# Altium PCB PCB1.PcbDoc
Units mil, origin at the board's own origin, x right, y up, seen from the top; angles counter-clockwise.
Board outline 6825 x 4110 mil, 2 copper layers (Top Layer, Bottom Layer); 37 components, 94 nets, 281 pads, 62 vias.
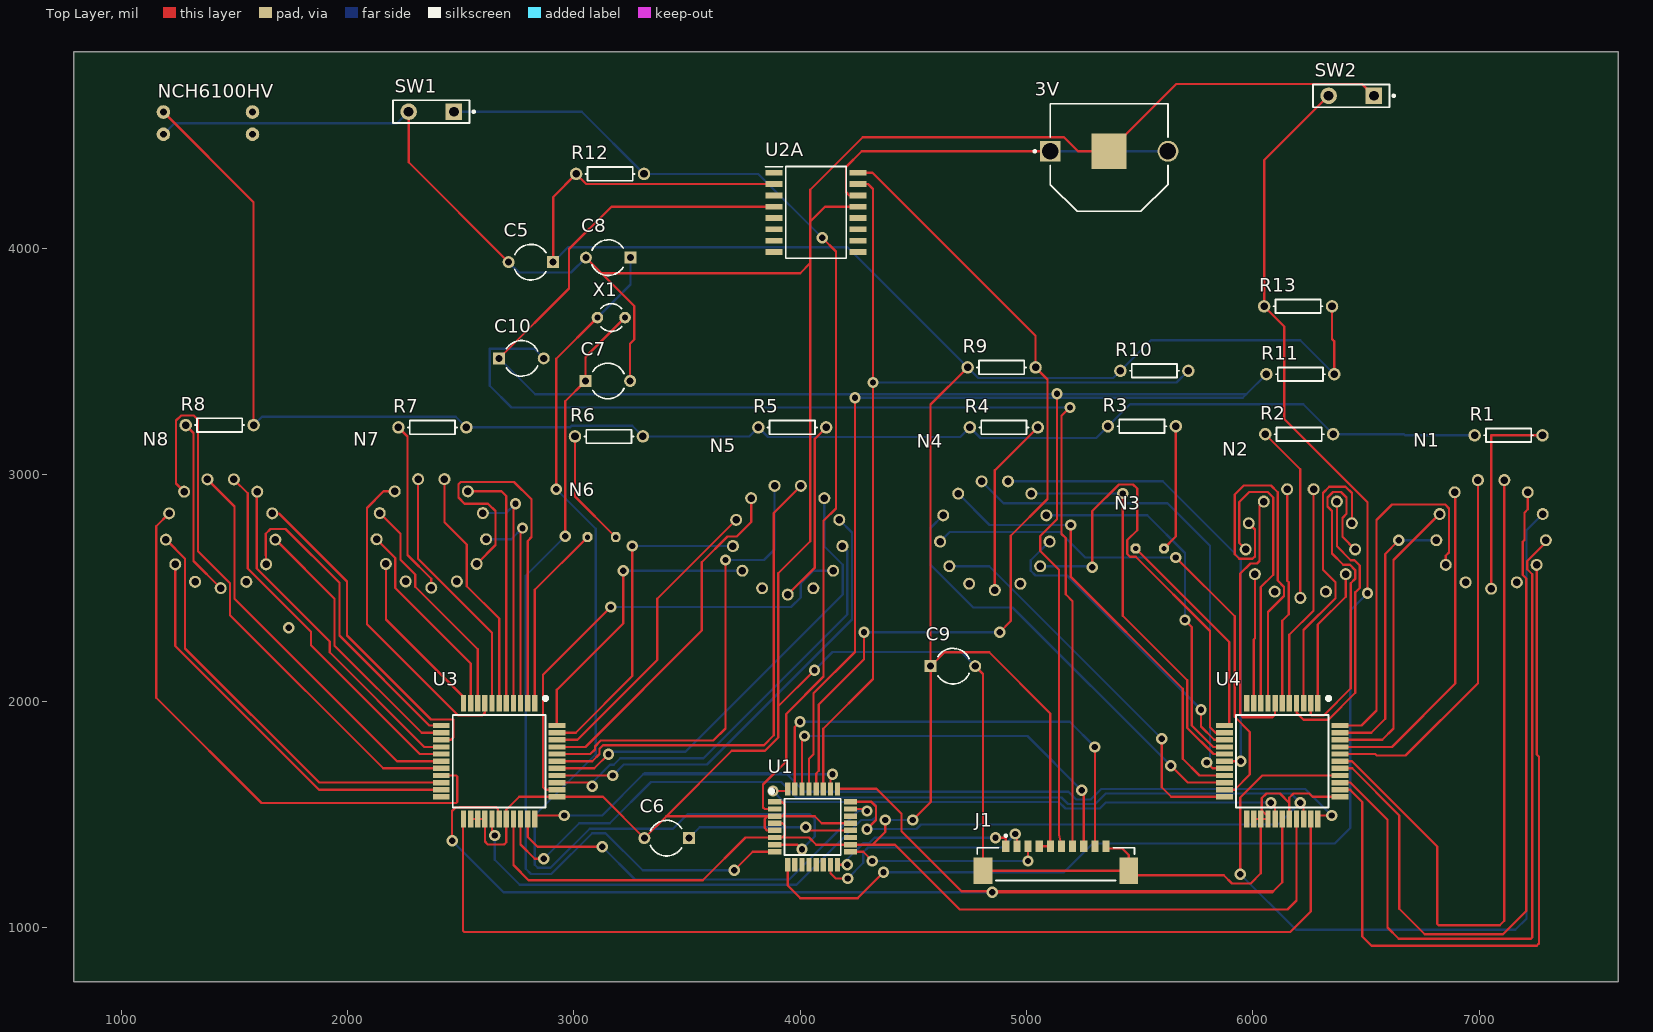
[diagram p0: Top Layer view]
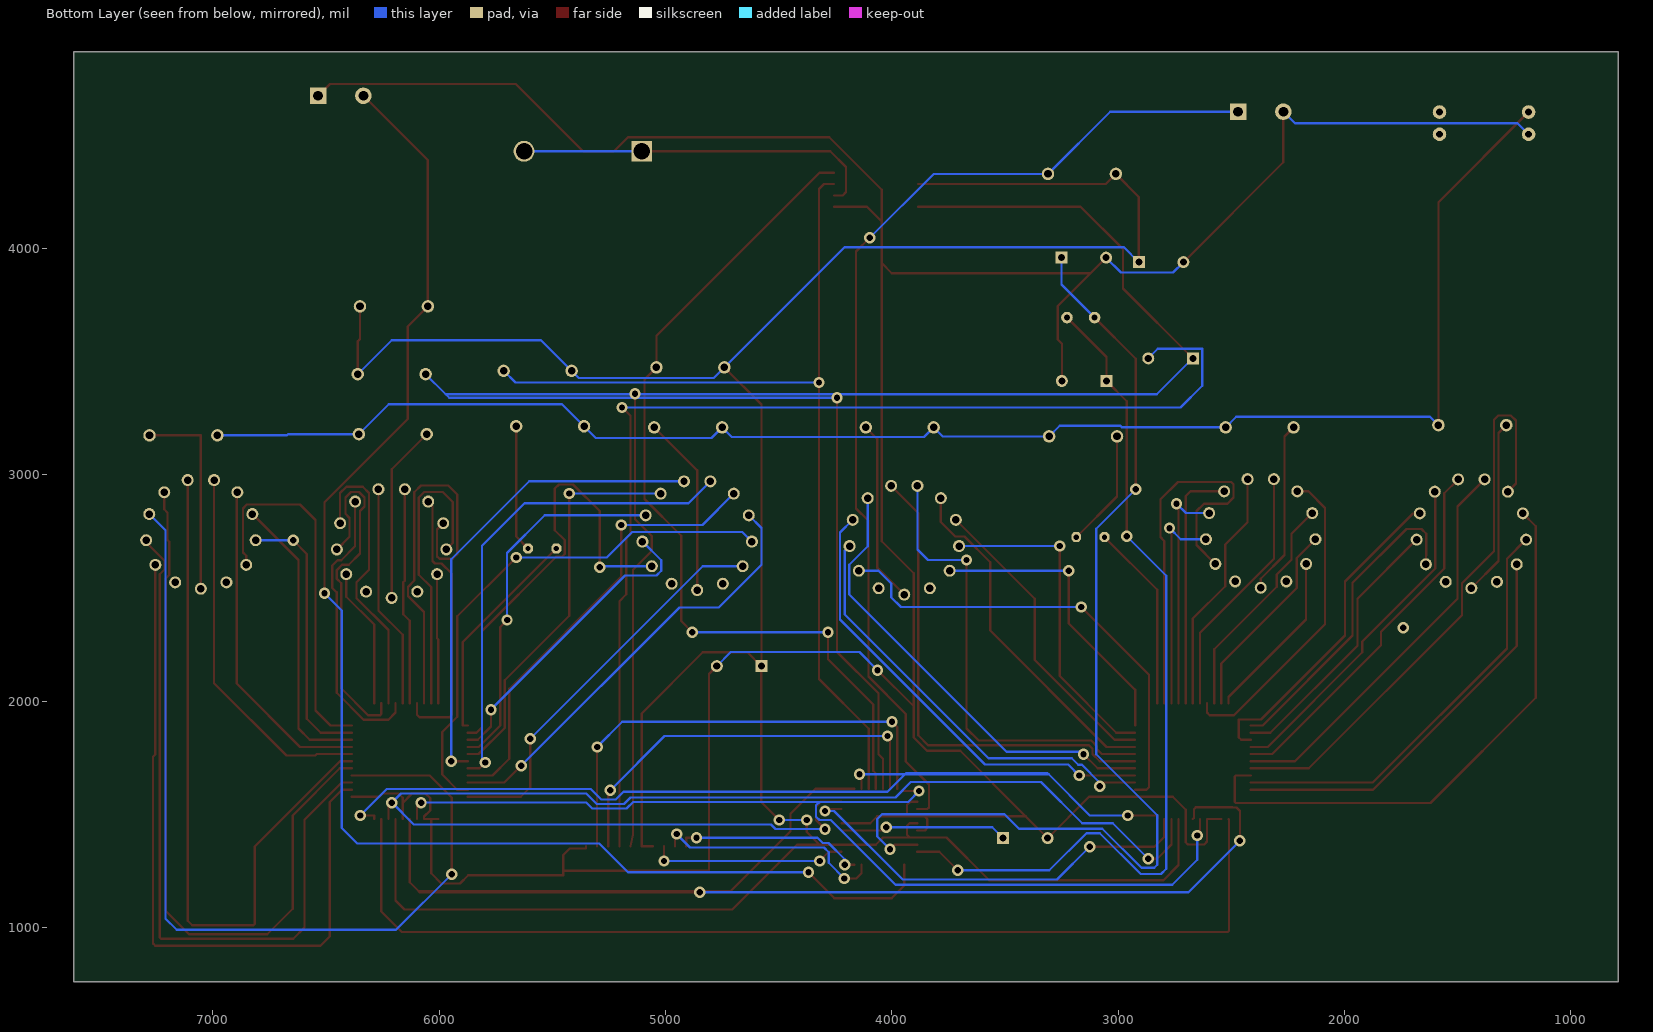
[diagram p1: Bottom Layer view, seen from below]

## Layer stack, top to bottom
Top Solder: solder mask 0.4, Solder Resist, Dk 3.5
Top Layer: signal copper 1.4
Dielectric 1: dielectric 12.6, FR-4, Dk 4.8
Bottom Layer: signal copper 1.4
Bottom Solder: solder mask 0.4, Solder Resist, Dk 3.5

## Board outline
790,760 7615,760 7615,4870 790,4870
cut-out: 8090,5925

## Design rules (kind name [scope] priority, off if disabled: settings)
Clearance [All] p1: gap=10 ignorepadtopadclearanceinfootprint=FALSE except(0: Arc-Hole Track-Hole SMDPad-Hole THPad-Hole Via-Hole Fill-Hole Poly-Hole Region-Hole Text-Hole)
PolygonConnect [All] p1: connectstyle=Relief reliefconductorwidth=10 reliefentries=4 polygonreliefangle="90 Angle" airgapwidth=10
RoutingVias [All] p1: holewidth=28 width=50 viastyle="Through Hole" minholewidth=28 minwidth=50 maxholewidth=28 maxwidth=50
SolderMaskExpansion [All] p1: expansion=4 istentingtop=FALSE
Width [All] p1: maxlimit=10 minlimit=10 preferedwidth=10
30 further rules are at their usual default settings.

## Classes and differential pairs
component class Sheet2: 3V C5 C6 C7 C8 C9 C10 J1 NCH6100HV R9 R10 R11 R12 R13 SW1 SW2 U1 U2A X1
component class Sheet1: N1 N2 N3 N4 N5 N6 N7 N8 R1 R2 R3 R4 R5 R6 R7 R8 U3 U4

## Components (designator, comment, footprint, x,y, rotation, side; value= is the part's Value field where it differs from the comment)
3V "3001" KSTN-3001_V 5365,4430 r0 top
C5 "" CAPR5-4X5 2810,3940 r180 top value=0.1µF
C6 "" CAPR5-4X5 3410,1395 r180 top value=0.1µF
C7 "" CAPR5-4X5 3150,3415 r0 top value=18pF
C8 "" CAPR5-4X5 3151.57,3960 r180 top value=18pF
C9 "" CAPR5-4X5 4675,2155 r0 top value=0.1µF
C10 "" CAPR5-4X5 2768.43,3515 r0 top value=0.1µF
J1 "53398-1071" MOLX-53398-1071_V 5130,1290 r180 top (schematic designator P?)
N1 "IN-14: medium numeric frontview nixie tube" IN-14 7053.25,2740.78 r0 top
N2 "IN-14: medium numeric frontview nixie tube" IN-14 6210,2700 r0 top
N3 "IN-3: nixie bulb" IN-3 5545,2675 r0 top
N4 "IN-14: medium numeric frontview nixie tube" IN-14 4860,2735 r0 top
N5 "IN-14: medium numeric frontview nixie tube" IN-14 3945,2715 r0 top
N6 "IN-3: nixie bulb" IN-3 3122.5,2725 r0 top
N7 "IN-14: medium numeric frontview nixie tube" IN-14 2370,2745 r0 top
N8 "IN-14: medium numeric frontview nixie tube" IN-14 1439.44,2743.44 r0 top
NCH6100HV "NCH6100HV" NCH6100HV 1580,4603.43 r180 top
R1 "" AXIAL-0.3 7130,3175 r0 top value=27k
R2 "" AXIAL-0.3 6205,3180 r180 top value=120k
R3 "" AXIAL-0.3 5510,3215 r0 top value=27k
R4 "" AXIAL-0.3 4900,3210 r0 top value=27k
R5 "" AXIAL-0.3 3965,3210 r0 top value=27k
R6 "" AXIAL-0.3 3155,3170 r180 top value=120k
R7 "" AXIAL-0.3 2375,3210 r180 top value=27k
R8 "" AXIAL-0.3 1435,3220 r180 top value=27k
R9 "" AXIAL-0.3 4890,3475 r180 top value=4.7k
R10 "" AXIAL-0.3 5565,3460 r180 top value=4.5k
R11 "" AXIAL-0.3 6210,3445 r180 top value=120k
R12 "" AXIAL-0.3 3160,4330 r180 top value=10k
R13 "" AXIAL-0.3 6200,3745 r180 top value=10k
SW1 "SW-PB" SPST-2 2370,4605 r180 top
SW2 "SW-PB" SPST-2 6435,4675 r180 top
U1 "ATMEGA328P-AUR" QFP80P900X900X120-32N 4055,1445 r0 top
U2A "DS3231M+TRL" SOIC127P1032X265-16N 4070,4160 r0 top
U3 "HV5622PG-G" QFP80P1390X1390X235-44N 2670,1735 r270 top
U4 "HV5622PG-G" QFP80P1390X1390X235-44N 6130,1735 r270 top
X1 "16MHz" R38 3165,3695 r90 top

## Footprints (in the part's own frame and the unit in brackets; to place one, negate y for a bottom-side part, rotate by r counter-clockwise, add the part's x,y. Pads: shape width x height; smd on the part's side, far side on the other; paste and mask are expansions set on the pad)
AXIAL-0.3 [mm] "Axial Device, Thru-Hole; 2 Leads; 0.3 in Pin Spacing"
  round 1.4 hole 0.85: 1(-3.81,0) 2(3.81,0)
  silkscreen extent -2.77,-0.76 2.77,0.76
CAPR5-4X5 [mm] "Capacitor; 2 Leads"
  rect 1.35x1.35 hole 0.8: 1(-2.5,0)
  round 1.35 hole 0.8: 2(2.5,0)
  silkscreen extent -1.69,-2 1.82,2
IN-3 [mil]
  oct 43.62x43.62 / inner round 40.3 / far side oct 43.62x43.62 hole 23.62: A(-62.5,0) K(62.5,0)
IN-14 [mm]
  round 1.348 hole 0.84: 0(5.094,-3.516) 1(-5.094,-3.516) 2(-6.145,-0.746) 3(-5.788,2.195) 4(-4.105,4.633) 5(-1.481,6.01) 6(1.481,6.01) 7(4.105,4.633) 8(5.788,2.195) 9(6.145,-0.746) A(0,-6.19) LHDP(2.877,-5.481) RHDP(-2.877,-5.481)
KSTN-3001_V [mm] "THD, 2-Leads, Body 13.21x12.07mm"
  rect 2.35x2.35 hole 1.85: 1(-6.605,0)
  round 2.35 hole 1.85: 2(6.605,0)
  rect 3.96x3.96 smd: 3(0,0)
  silkscreen extent -8.45,-6.73 6.61,5.34, body extent -6.61,-6.73 6.61,5.34, height 3
MOLX-53398-1071_V [mm] "SMD, 10-Leads, Body 17.65x3.7mm, Pitch 1.25mm"
  rect 0.8x1.3 smd: 1(5.625,-1.75) 2(4.375,-1.75) 3(3.125,-1.75) 4(1.875,-1.75) 5(0.625,-1.75) 6(-0.625,-1.75) 7(-1.875,-1.75) 8(-3.125,-1.75) 9(-4.375,-1.75) 10(-5.625,-1.75)
  rect 2.1x3 smd: MP1(8.175,1) MP2(-8.175,1)
  silkscreen extent -8.83,-3.07 8.82,2.1, body extent -8.82,-2.1 8.83,2.1, height 4.77
NCH6100HV [mil] "NCH6100HV"
  round 60 hole 30: 19(0,0) 20(0,98.43) 21(393.7,98.43) 22(393.7,0)
QFP80P900X900X120-32N [mm]
  rect 1.5x0.6 smd: 1(-4.25,2.8) 2(-4.25,2) 3(-4.25,1.2) 4(-4.25,0.4) 5(-4.25,-0.4) 6(-4.25,-1.2) 7(-4.25,-2) 8(-4.25,-2.8) 17(4.25,-2.8) 18(4.25,-2) 19(4.25,-1.2) 20(4.25,-0.4) 21(4.25,0.4) 22(4.25,1.2) 23(4.25,2) 24(4.25,2.8)
  rect 0.6x1.5 smd: 9(-2.8,-4.25) 10(-2,-4.25) 11(-1.2,-4.25) 12(-0.4,-4.25) 13(0.4,-4.25) 14(1.2,-4.25) 15(2,-4.25) 16(2.8,-4.25) 25(2.8,4.25) 26(2,4.25) 27(1.2,4.25) 28(0.4,4.25) 29(-0.4,4.25) 30(-1.2,4.25) 31(-2,4.25) 32(-2.8,4.25)
  silkscreen extent -4.8,-3.15 3.15,4.2, body extent -4.5,-4.5 4.5,4.5, height 1.2
QFP80P1390X1390X235-44N [mm]
  rect 1.9x0.6 smd: 1(-6.5,4) 2(-6.5,3.2) 3(-6.5,2.4) 4(-6.5,1.6) 5(-6.5,0.8) 6(-6.5,0) 7(-6.5,-0.8) 8(-6.5,-1.6) 9(-6.5,-2.4) 10(-6.5,-3.2) 11(-6.5,-4) 23(6.5,-4) 24(6.5,-3.2) 25(6.5,-2.4) 26(6.5,-1.6) 27(6.5,-0.8) 28(6.5,0) 29(6.5,0.8) 30(6.5,1.6) 31(6.5,2.4) 32(6.5,3.2) 33(6.5,4)
  rect 0.6x1.9 smd: 12(-4,-6.5) 13(-3.2,-6.5) 14(-2.4,-6.5) 15(-1.6,-6.5) 16(-0.8,-6.5) 17(0,-6.5) 18(0.8,-6.5) 19(1.6,-6.5) 20(2.4,-6.5) 21(3.2,-6.5) 22(4,-6.5) 34(4,6.5) 35(3.2,6.5) 36(2.4,6.5) 37(1.6,6.5) 38(0.8,6.5) 39(0,6.5) 40(-0.8,6.5) 41(-1.6,6.5) 42(-2.4,6.5) 43(-3.2,6.5) 44(-4,6.5)
  silkscreen extent -7.25,-5.2 5.2,5.4, body extent -6.95,-6.95 6.95,6.95, height 2.35
R38 [mm] "Crystal, Thru-Hole; 2 Leads; Body 3.1 x 8.2 mm (Dia.xH)"
  round 1.3 hole 0.7: 1(0,1.55) 2(0,-1.55)
  silkscreen extent -1.55,-1.19 1.55,1.17
SOIC127P1032X265-16N [mm]
  rect 1.925x0.65 smd: 1(-4.712,4.445) 2(-4.712,3.175) 3(-4.712,1.905) 4(-4.712,0.635) 5(-4.712,-0.635) 6(-4.712,-1.905) 7(-4.712,-3.175) 8(-4.712,-4.445) 9(4.712,-4.445) 10(4.712,-3.175) 11(4.712,-1.905) 12(4.712,-0.635) 13(4.712,0.635) 14(4.712,1.905) 15(4.712,3.175) 16(4.712,4.445)
  silkscreen extent -5.68,-5.15 3.4,5.15, body extent -5.16,-5.15 5.16,5.15, height 2.65
SPST-2 [mm] "Switch; 2 Leads"
  rect 1.85x1.85 hole 1.1: 1(-2.54,0)
  round 1.85 hole 1.1: 2(2.54,0)
  silkscreen extent -4.89,-1.27 4.28,1.27

## Part data
3V: library part CMP-2000-05463-1, "Holder Battery Coin, 12 mm, 2-Pin THD, RoHS", Manufacturer=Keystone, Package Description="2-Pin Through Hole Device, Body 13.21 x 12.07 mm", Datasheet URL=https://datasheet.ciiva.com/3/3001-3954.pdf, Datasheet Version="Rev. H, 09/2006", Manufacturer URL=http://www.keyelco.com/, Mounting Technology=ThroughHole, Package Reference=3001
C5 C6 C7 C8 C9 C10: library part Cap2, "Capacitor", PackageDescription="Capacitor; 2 Leads", PackageReference=CAPR5-4X5, Published=23-Sep-2002, Publisher="Altium Limited"
J1: library part CMP-2000-05635-1, "Male Header, Pitch 1.25 mm, 1 x 10 Position, Height 4.7 mm, -40 to 85 degC, RoHS, Tape and Reel", Current Rating=1A, Manufacturer=Molex, Package Description="Male Header, Pitch 1.25 mm, 1 x 10 Position, Height 4.7 mm", Voltage Rating=125V, =0533981071, Brand=Molex, Contact Gender=Pin(Male), Contact Material=PhosphorBronze, Contact Plating=Tin, Datasheet URL=http://www.molex.com/pdm_docs/sd/533981071_sd.pdf, Datasheet Version="Rev. J, 09/2015", Factory Pack Quantity=1000, Housing Material=Nylon, Manufacturer URL=http://www.molex.com/, Mounting Angle=Vertical, Mounting Style=SMD, Mounting Technology=SurfaceMount, Number of Positions=10Position, Number of Rows=1Row, Package Reference=53398-1071, Packaging=Reel, Pitch=1.25mm, Product=Headers, Product Category=Headers&WireHousings, RoHS=Details, Series=53398, Termination Style=SMD, Tradename=PicoBlade, Type=Shrouded
N1 N2 N4 N5 N7 N8: library part IN-14, DeviceSetName=IN-14, GateName_1=G$1, LibraryName=nixies-us, Package=IN-14, SymbolName_1=IN-14
N3 N6: library part IN-3, DeviceSetName=IN-3, GateName_1=G$1, LibraryName=nixies-us, Package=IN-3, SymbolName_1=IN-3
R1 R2 R3 R4 R5 R6 R7 R8 R9 R10 R11 R12 R13: library part Res1, "Resistor", LatestRevisionDate=17-Jul-2002, LatestRevisionNote="Re-released for DXP Platform.", PackageDescription="Axial Device, Thru-Hole; 2 Leads; 0.3 in Pin Spacing", PackageReference=AXIAL-0.3, Published=8-Jun-2000, Publisher="Altium Limited"
SW1 SW2: "Switch", LatestRevisionDate=17-Jul-2002, LatestRevisionNote="Re-released for DXP Platform.", PackageDescription="Switch; 2 Leads", PackageReference=SPST-2, Published=24-Mar-1999, Publisher="Altium Limited"
U1: "Integrated Circuit", Manufacturer_Name=Microchip, Mouser Part Number=556-ATMEGA328P-AUR, RS Part Number=1773264P, Datasheet Link=http://www.farnell.com/datasheets/1693866.pdf, Height=1.2mm, Manufacturer_Part_Number=ATMEGA328P-AUR, Mouser Price/Stock=https://www.mouser.com/Search/Refine.aspx?Keyword=556-ATMEGA328P-AUR, RS Price/Stock=http://uk.rs-online.com/web/p/products/1773264P
U2A: "Integrated Circuit", Manufacturer_Name="Maxim Integrated", Mouser Part Number=700-DS3231M+TRL, Datasheet Link=http://componentsearchengine.com/Datasheets/1/DS3231M+TRL.pdf, Height=2.65mm, Manufacturer_Part_Number=DS3231M+TRL, Mouser Price/Stock=https://www.mouser.com/Search/Refine.aspx?Keyword=700-DS3231M%2BTRL
U3 U4: "Integrated Circuit", Manufacturer_Name=Microchip, Mouser Part Number=689-HV5622PG-G, Allied Price/Stock=https://www.alliedelec.com/microchiptechnologyinc-hv5622pg-g/70453262/, Allied_Number=70453262, Datasheet Link=https://componentsearchengine.com/Datasheets/1/HV5622PG-G.pdf, Height=2.35mm, Manufacturer_Part_Number=HV5622PG-G, Mouser Price/Stock=https://www.mouser.com/Search/Refine.aspx?Keyword=689-HV5622PG-G
X1: library part XTAL, "Crystal Oscillator", LatestRevisionDate=17-Jul-2002, LatestRevisionNote="Re-released for DXP Platform.", PackageDescription="Crystal, Thru-Hole; 2 Leads; Body 3.1 x 8.2 mm (Dia.xH)", PackageReference=R38, Published=8-Jun-2000, Publisher="Altium Limited"

## Via types
v1: diameter 50, hole 28, Top Layer to Bottom Layer, 62 vias

## Nets (pads, with @x,y where several pads share a name; then routed paths per layer and width w, separated by ;. In a path a pad name is that pad's centre, name@x,y a point inside that pad or via, vN(x,y) a via of type N, cw(c..) or ccw(c..) an arc to the next point about the centre after c; other vN are vias at no path point)
+3V: 3V.1 3V.2 U2A.14 | length 1621.8
  Top Layer w10: U2A.14 4217,4235 4202,4250 4202,4360 4272,4430 3V.1
  Bottom Layer w10: 3V.1 3V.2
+5V: C5.1 C9.1 J1.4 J1.5 R9.2 R10.2 R11.1 R12.2 R13.1 U1.4 U1.6 U1.18 U2A.2 U3.30 U4.30 | length 13519.7
  Top Layer w10: U3.30 2732.99,1276.01 2800,1209 3569.69,1209 3758.45,1397.76 U1.6 3920.76,1397.76 ; C5.1 2908.43,4228.43 R12.2 3055,4285 U2A.2 ; U1.4 3922.25,1460.75 3933,1450 3933,1410 3920.76,1397.76 ; v1(4376,1475) 4376,1422.26 4320,1366.26 ; v1(4497,1475) 4576.57,1554.57 C9.1 ; R9.2 4576,3311 4576,2158 4576.57,2158 C9.1 ; J1.4 J1.5 5105.39,1946.18 4835,2216.58 4638.15,2216.58 C9.1 ; U4.30 6192.99,1120 6152.99,1080 4705,1080 4418.74,1366.26 4320,1366.26 ; R13.1 6350,3600 6360,3590 R11.1 ; 3920.76,1397.76 4039,1397.76 4070.5,1366.26 U1.18 4320,1366.26
  Bottom Layer w10: C5.1 2974.54,4006.11 4208.89,4006.11 R9.2 4787,3428 5383,3428 R10.2 5550,3595 6210,3595 R11.1 ; v1(4376,1475) v1(4497,1475)
GND: 3V.3 C5.2 C6.2 C7.2 C8.2 C9.2 J1.10 J1.MP1 J1.MP2 NCH6100HV.21 SW1.2 SW2.1 U1.1 U1.3 U1.5 U1.21 U2A.13 U3.24 U3.25 U3.26 U3.29 U3.34 U4.24 U4.25 U4.26 U4.29 U4.34 | length 16622.2
  Top Layer w10: SW1.2 2270,4381.57 C5.2 ; U3.24 U3.25 U3.26 2607.01,1379.68 2620,1366.69 2691.07,1366.69 2701.5,1377.12 U3.29 2701.5,1520 2759.02,1577.52 U3.34 3129.05,1577.52 C6.2 3408.82,1492.24 ; C8.2 3122.15,3891 ; C7.2 3248.43,3579.43 3267,3598 3267,3746.15 3122.15,3891 ; U1.5 3853.75,1429.25 3843,1440 3843,1480 3855.24,1492.24 ; U1.1 3920,1555.24 3933,1542.24 3933,1505.24 3920,1492.24 ; v1(4063,2137) 3903.46,1977.46 ; U1.21 4095.52,1460.75 4064.02,1492.24 3920,1492.24 ; U2A.13 4110,4185 4045,4120 ; C9.2 4808.15,2120.28 J1.MP1 J1.MP2 ; J1.10 5351.46,1349 5422.85,1349 5451.85,1320 J1.MP2 ; U4.24 U4.25 ; U4.29 6161.5,1550.5 ; U4.34 6263.37,1577.52 6248.89,1592 6180,1592 6161.5,1573.5 6161.5,1550.5 ; SW2.1 6483,4727 5662,4727 3V.3 5228,4430 5166,4492 4277,4492 4045,4260 4045,4120 ; 3122.15,3891 4000,3891 4045,3936 ; 3408.82,1492.24 3855.24,1492.24 ; 3408.82,1492.24 3697.57,1781 3845,1781 3903.46,1839.46 3903.46,1977.46 ; 3855.24,1492.24 U1.3 3920,1492.24 ; 3903.46,1977.46 3903.46,2565 4045,2706.54 4045,3936 ; 4045,3936 4045,4120 ; J1.MP2 5451.85,1231 5872,1231 5908,1195 5990.51,1195 6035.51,1240 U4.25 ; U4.25 U4.26 6067.01,1490.67 6040,1517.68 6040,1572 6060,1592 6120,1592 6161.5,1550.5
  Bottom Layer w10: NCH6100HV.21 1235.3,4554 2219,4554 SW1.2 ; C5.2 2757.57,3894 2987.15,3894 C8.2 ; v1(4063,2137) 4143,2217 4711.43,2217 C9.2
NetC6_1: C6.1 U1.20 | length 739.5
  Top Layer w10: v1(4024,1443) 4037.75,1429.25 U1.20
  Bottom Layer w10: C6.1 3556.43,1443 v1(4024,1443)
NetC7_1: C7.1 U1.8 X1.2 | length 3903.8
  Top Layer w10: v1(2962,2729) 2962,3325.43 C7.1 3051.57,3520.55 X1.2 ; v1(3709,1253) 3790.76,1334.76 U1.8
  Bottom Layer w10: v1(2962,2729) 2787,2554 2787,1260 2810.43,1236.57 2900.57,1236.57 3081,1417 3140,1417 3304,1253 v1(3709,1253)
NetC8_1: C8.1 U1.7 X1.1 | length 4638.3
  Top Layer w10: v1(2922,2937) 2922,3513.02 X1.1 ; U1.7 3987.74,1366.26 v1(4008,1346)
  Bottom Layer w10: v1(2922,2937) 3097,2762 3097,1766 2827,1496 2827,1277 2840,1264 2897,1264 3070,1437 3438,1437 3502,1501 4043,1501 4064,1480 4064,1402 v1(4008,1346) ; X1.1 3250,3841.02 C8.1
NetC10_1: C10.1 J1.6 R11.2 U1.29 U2A.4 | length 10702.3
  Top Layer w10: C10.1 2979,3824 2979,3998 3166,4185 U2A.4 ; U1.29 4039.25,1746.25 4059,1766 4059,2035 4242,2218 v1(4242,3341) ; v1(5135,3358) 5135,2804.62 5060.38,2730 5060.38,2664.09 5144,2580.48 5144,1410.61 J1.6
  Bottom Layer w10: C10.1 2829,3356 v1@5135,3356 ; v1(4242,3341) 5956,3341 5971,3356 ; v1(5135,3358) v1@5135,3356 ; R11.2 5971,3356 ; v1@5135,3356 5971,3356
NetC10_2: C10.2 J1.7 | length 4997.7
  Top Layer w10: v1(5192,3298) 5155,3261 5155,2739 5173,2721 5173,2473 5203.82,2442.18 J1.7
  Bottom Layer w10: C10.2 2824.85,3557 2628,3557 2628,3394 2724,3298 v1(5192,3298)
NetJ1_1: J1.1 U1.16 | length 846.4
  Top Layer w10: U1.16 4165.24,1277 v1(4208,1277) ; v1(4863,1397) 4908.54,1397 J1.1
  Bottom Layer w10: v1(4208,1277) 4208,1302 4280,1374 4305,1374 4328,1397 v1(4863,1397)
NetJ1_2: J1.2 U1.15 | length 1030.1
  Top Layer w10: U1.15 4133.74,1240 4156.74,1217 v1(4210,1217) ; v1(4951,1413) 4957.76,1406.24 J1.2
  Bottom Layer w10: v1(4210,1217) 4279,1286 4279,1333 4300,1354 4892,1354 v1(4951,1413)
NetJ1_3: J1.3 U1.17 | length 866.4
  Top Layer w10: U1.17 4278.24,1334.76 v1(4319,1294) ; v1(5006.97,1294) J1.3
  Bottom Layer w10: v1(4319,1294) v1(5006.97,1294)
NetJ1_8: J1.8 U1.30 | length 1813.6
  Top Layer w10: U1.30 4007.76,1834.76 v1(4019,1846) ; v1(5244,1606) 5253.03,1596.97 J1.8
  Bottom Layer w10: v1(4019,1846) 5004,1846 v1(5244,1606)
NetJ1_9: J1.9 U1.31 | length 2094.3
  Top Layer w10: U1.31 3976.26,1886.26 v1(3999,1909) ; J1.9 v1(5302.24,1797.76)
  Bottom Layer w10: v1(3999,1909) 5191,1909 v1(5302.24,1797.76)
NetN1_0: N1.0 U4.35 | length 3194.2
  Top Layer w10: U4.35 6430,1609.02 6484,1555.02 6484,960 6524,920 7255,920 7265,930 7265,1754.75 7255,1764.75 7255,2601.15 N1.0
NetN1_1: N1.1 U4.44 | length 1641.2
  Top Layer w10: U4.44 6480,1892.48 6547,1959.48 6547,2801 6615,2869 6850,2869 6867,2852 6867,2657.31 6852.69,2643 N1.1
NetN1_2: N1.2 U4.43 | length 1204.1
  Top Layer w10: U4.43 6523,1860.98 6585,1922.98 6585,2651 v1(6645.41,2711.41)
  Bottom Layer w10: v1(6645.41,2711.41) N1.2
NetN1_3: N1.3 U4.42 | length 1288.5
  Top Layer w10: U4.42 6571.49,1829.49 6622,1880 6622,2623.81 N1.3
NetN1_4: N1.4 U4.41 | length 1471.7
  Top Layer w10: U4.41 6614.99,1797.99 6895,2078 6895,2919.84 N1.4
NetN1_5: N1.5 U4.40 | length 1641.7
  Top Layer w10: U4.40 6541.06,1766.5 6547.56,1760 6675,1760 6994.93,2079.93 N1.5
NetN1_6: N1.6 U4.39 | length 3182.1
  Top Layer w10: U4.39 6438,1735 6815,1358 6815,1015.86 6820.86,1010 7091.57,1010 7111.57,1030 N1.6
NetN1_7: N1.7 U4.38 | length 3276.3
  Top Layer w10: U4.38 6439,1703.5 6647,1495.5 6647,1083 6760,970 7105,970 7208.03,1073.04 7208.03,2542.2 7192.27,2557.96 7192.27,2704.51 7200,2712.24 7200,2833.07 7214.85,2847.92 N1.7
NetN1_8: N1.8 U4.37 | length 4024.3
  Top Layer w10: v1(5945,1236) 5945,1575 6042.01,1672.01 U4.37
  Bottom Layer w10: v1(5945,1236) 6191,990 7160,990 7209,1039 7209,2755.09 N1.8
NetN1_9: N1.9 U4.36 | length 3215.7
  Top Layer w10: U4.36 6430.49,1640.51 6595,1476 6595,1000 6645,950 7229.14,950 7235,955.86 7235,2560.91 7212.27,2583.63 7212.27,2619.54 7295.17,2702.44 N1.9
NetN1_A: N1.A R1.2 | length 904.2
  Top Layer w10: N1.A 7053.25,3174.25 7054,3175 R1.2
NetN2_0: N2.0 U4.1 | length 621.6
  Top Layer w10: U4.1 6287.48,2338.48 6410.56,2461.56 N2.0
NetN2_1: N2.1 U4.10 | length 572.9
  Top Layer w10: U4.10 6004.02,2273 6009.44,2278.42 N2.1
NetN2_2: N2.2 U4.9 | length 1330.8
  Top Layer w10: N2.2 5940,2698.71 5940,2880 5984,2924 6066,2924 6090,2900 6090,2559.02 6035.51,2504.54 U4.9
NetN2_3: N2.3 U4.8 | length 1716.5
  Top Layer w10: N2.3 6009.62,2758.94 6009.62,2640 5998.71,2629.09 5940,2629.09 5920,2649.09 5920,2913 5960,2953 6080,2953 6110,2923 6110,2533 6138.29,2504.71 6138.29,2465.29 6067.01,2394.01 U4.8
NetN2_4: N2.4 U4.7 | length 1215.5
  Top Layer w10: N2.4 6029.62,2863.63 6029.62,2620 6018.47,2608.86 5989.86,2608.86 5945,2564 5945,1940 5956,1929 6087.5,1929 6098.5,1940 U4.7
NetN2_5: N2.5 U4.6 | length 960.2
  Top Layer w10: U4.6 6130,2356 6158.29,2384.29 6158.29,2525.76 6151.68,2532.36 N2.5
NetN2_6: N2.6 U4.5 | length 990
  Top Layer w10: U4.5 6161.5,2293.34 6268.32,2400.16 N2.6
NetN2_7: N2.7 U4.4 | length 1267.3
  Top Layer w10: U4.4 6192.99,1950 6224.49,1918.5 6334.29,1918.5 6453,2037.21 6453,2480.93 6472.1,2500.02 6472.1,2600 6449,2623.1 6432.9,2623.1 6371.6,2684.4 N2.7
NetN2_8: N2.8 U4.3 | length 1294.5
  Top Layer w10: U4.3 6224.49,2315.01 6365,2455.52 6365,2526 6310.06,2580.94 6310.06,2920 6337.97,2947.91 6409.95,2947.91 6437.86,2920 N2.8
NetN2_9: N2.9 U4.2 | length 1557.9
  Top Layer w10: U4.2 6255.98,1943.19 6260.67,1938.5 6314.29,1938.5 6433,2057.21 6433,2521 6452.1,2540.1 6452.1,2580 6429,2603.1 6400,2603.1 6350,2653.1 6350,2841 6330.06,2860.94 6330.06,2900 6354.06,2924 6390,2924 6414,2900 6414,2828 6396,2810 6396,2726.55 N2.9
NetN2_A: N2.A R2.2 | length 787.9
  Top Layer w10: R2.2 6210,3025 N2.A
NetN3_A: N3.A U4.12 | length 975.4
  Top Layer w10: N3.A 5895.81,2261.69 5895.81,1892.48 U4.12
NetN3_K: N3.K R3.2 | length 561.7
  Top Layer w10: N3.K 5660,2727.5 R3.2
NetN4_0: N4.0 U4.13 | length 2046.2
  Top Layer w10: v1(5290,2592) 5290,2839 5409,2958 5471,2958 5489,2940 5489,2755.31 5445.69,2712 5445.69,2650 5457.69,2638 5483,2638 5811,2310 5811,1885 5835.02,1860.98 U4.13
  Bottom Layer w10: N4.0 5285.44,2596.56 v1(5290,2592)
NetN4_1: N4.1 U4.22 | length 1762.2
  Top Layer w10: v1(5598,1833.71) 5598,1619.52 5640,1577.52 U4.22
  Bottom Layer w10: N4.1 4835.15,2596.56 v1(5598,1833.71)
NetN4_2: N4.2 U4.21 | length 2341.4
  Top Layer w10: v1(5660,2635) 5920,2375 5920,1931 5987,1864 5987,1676.02 5920,1609.02 U4.21
  Bottom Layer w10: N4.2 4660.45,2748 5146.97,2748 5259.97,2635 v1(5660,2635)
NetN4_3: N4.3 U4.20 | length 1938.4
  Top Layer w10: v1(5638,1714.51) 5712,1640.51 U4.20
  Bottom Layer w10: N4.3 4576,2765.28 4576,2603 4765,2414 4938.51,2414 v1(5638,1714.51)
NetN4_4: N4.4 U4.19 | length 2006.4
  Top Layer w10: v1(5195,2779) 5195,2551 5690.76,2055.24 5690.76,1745.74 5764.5,1672.01 U4.19
  Bottom Layer w10: N4.4 4836.81,2779 v1(5195,2779)
NetN4_5: N4.5 U4.18 | length 2179.4
  Top Layer w10: v1(5796.5,1729) 5822,1703.5 U4.18
  Bottom Layer w10: N4.5 4898.3,2875 5623,2875 5811,2687 5811,1743.5 v1(5796.5,1729)
NetN4_6: N4.6 U4.17 | length 2136.3
  Top Layer w10: U4.17 v1(5947,1735)
  Bottom Layer w10: N4.6 5602.38,2971.62 5947,2627 v1(5947,1735)
NetN4_7: N4.7 U4.16 | length 1769.7
  Top Layer w10: v1(5425.69,2918) 5425.69,2377.7 5710.76,2092.62 5710.76,1881.73 5826,1766.5 U4.16
  Bottom Layer w10: N4.7 5425.1,2917.41 v1(5425.69,2918)
NetN4_8: N4.8 U4.15 | length 1638.9
  Top Layer w10: v1(5700,2359) 5730.76,2328.24 5730.76,1892.24 5825.01,1797.99 U4.15
  Bottom Layer w10: N4.8 5533.58,2821.42 5700,2655 v1(5700,2359)
NetN4_9: N4.9 U4.14 | length 1371.9
  Top Layer w10: v1(5771,1963) 5771,1888.49 5830,1829.49 U4.14
  Bottom Layer w10: N4.9 5019.02,2622.73 5019.02,2575.98 5040,2555 5179,2555 v1(5771,1963)
NetN4_A: N4.A R4.2 | length 797.4
  Top Layer w10: N4.A 4860,3020 R4.2
NetN5_0: N5.0 U3.35 | length 2071.7
  Top Layer w10: U3.35 2874.98,1609.02 2864,1620 2864,2117 v1(3163,2416)
  Bottom Layer w10: v1(3163,2416) 3960,2416 4002,2458 4002,2520 4058.56,2576.56 N5.0
NetN5_1: N5.1 U3.44 | length 1332.8
  Top Layer w10: U3.44 2925,1892.48 2925,2050.76 3218,2343.76 v1(3218,2576.56)
  Bottom Layer w10: v1(3218,2576.56) N5.1
NetN5_2: N5.2 U3.43 | length 1455.4
  Top Layer w10: U3.43 3007.98,1860.98 3258,2111 v1(3258,2685.63)
  Bottom Layer w10: v1(3258,2685.63) N5.2
NetN5_3: N5.3 U3.42 | length 1352.7
  Top Layer w10: U3.42 3016.49,1829.49 3369,2182 3369,2453.28 N5.3
NetN5_4: N5.4 U3.41 | length 1551.9
  Top Layer w10: U3.41 3050.99,1797.99 3565,2312 3565,2614 3679,2728 3720,2728 3783.4,2791.4 N5.4
NetN5_5: N5.5 U3.40 | length 2059.7
  Top Layer w10: U3.40 3072.51,1766.5 3093,1786.99 3093,1800 3119,1826 3616,1826 3670,1880 v1(3670,2624)
  Bottom Layer w10: v1(3670,2624) 3840,2624 3886.68,2670.68 N5.5
NetN5_6: N5.6 U3.39 | length 2170.3
  Top Layer w10: U3.39 3081.01,1735 3113,1766.99 3113,1790 3129,1806 3840,1806 3883.46,1849.46 3883.46,2831.76 N5.6
NetN5_7: N5.7 U3.38 | length 2039.5
  Top Layer w10: U3.38 3090.5,1703.5 v1(3153,1766)
  Bottom Layer w10: v1(3153,1766) 3164,1777 3493,1777 4188,2472 4188,2603 4106.6,2684.4 N5.7
NetN5_8: N5.8 U3.37 | length 2052.3
  Top Layer w10: U3.37 v1(3172.56,1672.01)
  Bottom Layer w10: v1(3172.56,1672.01) 3220.55,1720 3588.23,1720 4229,2360.77 4229,2745.28 N5.8
NetN5_9: N5.9 U3.36 | length 1924.2
  Top Layer w10: U3.36 3064.49,1640.51 v1(3081,1624)
  Bottom Layer w10: v1(3081,1624) 3081,1640.31 3160,1719.31 3176.31,1719.31 3205,1748 3573.01,1748 4208,2382.99 4208,2664.55 N5.9
NetN5_A: N5.A R5.2 | length 809.1
  Top Layer w10: N5.A 4065,2591.3 4065,3160 R5.2
NetN6_A: N6.A U3.1 | length 830.4
  Top Layer w10: U3.1 2827.48,2492.48 N6.A
NetN6_K: N6.K R6.2 | length 519.6
  Top Layer w10: R6.2 3005,2905 N6.K
NetN7_0: N7.0 U3.2 | length 1783
  Top Layer w10: N7.0 2654,2690 2654,2840 2621,2873 2517,2873 2490,2900 2490,2959 2500,2969 2736,2969 2813,2892 2813,2725.42 2795.98,2708.4 U3.2
NetN7_1: N7.1 U3.11 | length 757.8
  Top Layer w10: N7.1 2169.44,2361.56 2512.52,2018.48 U3.11
NetN7_2: N7.2 U3.10 | length 897
  Top Layer w10: N7.2 2211,2632.71 2211,2500 2544.02,2166.98 U3.10
NetN7_3: N7.3 U3.9 | length 1020
  Top Layer w10: N7.3 2234,2739.56 2234,2625 2299,2560 2299,2506 2575.51,2229.49 U3.9
NetN7_4: N7.4 U3.8 | length 1400.3
  Top Layer w10: N7.4 2159.41,2927.41 2086,2854 2086,2339.79 2487.79,1938 2595.01,1938 2607.01,1950 U3.8
NetN7_5: N7.5 U3.7 | length 1126.1
  Top Layer w10: N7.5 2311.68,2629.32 2638.5,2302.5 U3.7
NetN7_6: N7.6 U3.6 | length 1090.8
  Top Layer w10: N7.6 2428.32,2790.68 2527,2692 2527,2508 2670,2365 U3.6
NetN7_7: N7.7 U3.5 | length 1094.2
  Top Layer w10: N7.7 2680.59,2927.41 2701.5,2906.5 U3.5
NetN7_8: N7.8 U3.4 | length 1047.2
  Top Layer w10: U3.4 2732.99,2863.99 v1(2742,2873)
  Bottom Layer w10: N7.8 2700.42,2831.42 v1(2742,2873)
NetN7_9: N7.9 U3.3 | length 959.1
  Top Layer w10: U3.3 2764.49,2756.49 v1(2773,2765)
  Bottom Layer w10: N7.9 2723.63,2715.63 v1(2773,2765)
NetN7_A: N7.A R7.2 | length 768.8
  Top Layer w10: R7.2 2265,3170 2265,2646.18 2370,2541.18 N7.A
NetN8_0: N8.0 U3.12 | length 1415.4
  Top Layer w10: N8.0 1640,2644 1639,2645 1639,2740 1660,2761 1726,2761 1964,2523 1964,2290 2361.52,1892.48 U3.12
NetN8_1: N8.1 U3.21 | length 1799.2
  Top Layer w10: N8.1 1238.88,2244.12 1873.98,1609.02 U3.21
NetN8_2: N8.2 U3.20 | length 1893.6
  Top Layer w10: N8.2 1282,2629.59 1282,2233 1874.49,1640.51 U3.20
NetN8_3: N8.3 U3.19 | length 2547
  Top Layer w10: N8.3 1155,2773.28 1155,2015 1620,1550 2479.14,1550 2485,1555.86 2485,1666.15 2479.14,1672.01 U3.19
NetN8_4: N8.4 U3.18 | length 2579.5
  Top Layer w10: N8.4 1242,2961.69 1242,3240 1265,3263 1320,3263 1339.58,3243.42 1339.58,2662.42 1480.98,2521.02 1480.98,2380 2157.47,1703.5 U3.18
NetN8_5: N8.5 U3.17 | length 1787.2
  Top Layer w10: N8.5 1500.98,2860.2 1500.98,2453.02 2219,1735 U3.17
NetN8_6: N8.6 U3.16 | length 1648.8
  Top Layer w10: N8.6 1559,2918.82 1559,2586 1838.37,2306.63 1838.37,2247.15 2319.03,1766.5 U3.16
NetN8_7: N8.7 U3.15 | length 1509.5
  Top Layer w10: N8.7 1598.46,2889.46 1598.46,2586.54 1921.19,2263.81 1921.19,2216.25 2339.44,1797.99 U3.15
NetN8_8: N8.8 U3.14 | length 1453.3
  Top Layer w10: N8.8 1697.14,2829.86 1998,2529 1998,2290.29 2369,1919.29 2467,1919.29 2467,1840 2456.49,1829.49 U3.14
NetN8_9: N8.9 U3.13 | length 1207.4
  Top Layer w10: N8.9 1942.73,2452.7 1942.73,2245.64 2327.38,1860.98 U3.13
NetN8_A: N8.A R8.2 | length 784.2
  Top Layer w10: R8.2 1319.58,3185.42 1319.58,2619.6 N8.A
NetNCH6100HV_22: NCH6100HV.22 R1.1 R2.1 R3.1 R4.1 R5.1 R6.1 R7.1 R8.1 | length 7190.9
  Top Layer w10: NCH6100HV.22 1585,4204.73 R8.1
  Bottom Layer w10: R8.1 1622,3257 2478,3257 R7.1 2983,3210 2990,3217 3258,3217 R6.1 3775,3170 R5.1 3858,3167 4707,3167 R4.1 4797,3163 5308,3163 R3.1 5457,3312 6223,3312 R2.1 6668,3180 6673,3175 R1.1
NetR9_1: R9.1 U1.28 U2A.16 | length 3882.3
  Top Layer w10: U1.28 4070.75,1681 4082,1692.25 4082,1986 4282,2186 v1(4282,2305) ; U2A.16 4320,4335 5040,3615 R9.1 5093,3422 5093,2893 4931,2731 4931,2354 v1(4882,2305)
  Bottom Layer w10: v1(4282,2305) v1(4882,2305)
NetR10_1: R10.1 U1.27 U2A.15 | length 4231.8
  Top Layer w10: U1.27 4102.24,1878.47 4322,2098.23 v1(4322,3408) 4322,4263 4300,4285 U2A.15
  Bottom Layer w10: v1(4322,3408) 5663,3408 R10.1
NetR12_1: R12.1 SW1.1 U1.2 | length 4588.1
  Top Layer w10: U1.2 3843.15,1523.74 3836,1530.89 3836,1632 3938,1734 3938,1944 4103,2109 4103,2797 4158,2852 4158,3987 v1(4097,4048)
  Bottom Layer w10: SW1.1 3035,4605 R12.1 3815,4330 v1(4097,4048)
NetR13_2: R13.2 SW2.2 U1.9 | length 6303.8
  Top Layer w10: U1.9 3944.76,1185.24 4000,1130 4254,1130 v1(4368,1244) ; SW2.2 6050,4390 R13.2 6139,3656 6139,3247.15 6507,2879.15 v1(6507,2477)
  Bottom Layer w10: v1(4368,1244) 5166,1244 5293,1371 6362,1371 6431,1440 6431,2401 v1(6507,2477)
NetU1_23: U1.23 U3.32 | length 1857.8
  Top Layer w10: U3.32 2795.98,1400 2838.98,1357 v1(3125,1357) ; U1.23 4286.26,1523.74 v1(4295,1515)
  Bottom Layer w10: v1(3125,1357) 3269.96,1212.04 3952.04,1212.04 4255,1515 v1(4295,1515)
NetU1_24: U1.24 U3.31 U4.31 | length 6078.8
  Top Layer w10: U3.31 2764.49,1366.51 2827,1304 v1(2867,1304) ; U1.24 4315,1555.24 4335,1535.24 4335,1475 v1(4295,1435) ; v1(6209,1552) 6224.49,1536.51 U4.31
  Bottom Layer w10: v1(2867,1304) 3024.12,1461.12 3158.88,1461.12 3340.76,1643 3916,1643 3984,1575 5154.75,1575 5183.82,1545.93 5303.82,1545.93 5349.89,1592 6169,1592 v1(6209,1552) 6112,1455 4533.82,1455 4513.82,1435 v1(4295,1435)
NetU1_25: U1.25 U3.28 U4.28 | length 6608.8
  Top Layer w10: v1(2462,1383) 2462,1515 2477,1530 2493,1530 2494.5,1531.5 2656.53,1531.5 2665.32,1522.71 2665.32,1483.78 U3.28 ; U1.25 4165.24,1613 4337,1613 4447.58,1502.42 4447.58,1425.51 4713.08,1160 6090,1160 ; v1(4849,1156) 6086,1156 6090,1160 ; U4.28 6130,1200 6090,1160
  Bottom Layer w10: v1(2462,1383) 2689,1156 v1(4849,1156)
NetU1_26: U1.26 U3.33 U4.33 | length 4713.3
  Top Layer w10: U3.33 2827.48,1495 v1(2957,1495) ; U1.26 4133.74,1667.74 v1(4143,1677) ; U4.33 6287.48,1495 v1(6349,1495)
  Bottom Layer w10: v1(2957,1495) 3125,1495 3307,1677 ; v1(4143,1677) 3942,1677 ; v1(6349,1495) 6232,1612 5329.89,1612 5283.82,1565.93 5219.98,1565.93 5185.91,1600 4019,1600 3942,1677 ; 3307,1677 3942,1677 ; 3307,1677 3313,1683 3936,1683 3942,1677
NetU1_32: U1.32 U3.27 U4.27 | length 4508.1
  Top Layer w10: U3.27 2638.5,1431.5 2651,1419 v1(2651,1407) ; v1(3880,1603) 3944.76,1603 U1.32 ; v1(6080,1552) 6098.5,1533.5 U4.27
  Bottom Layer w10: v1(2651,1407) 2651,1299 2761,1189 3984,1189 4270,1475 4320,1475 4335,1490 4335,1540 4320,1555 ; v1(3880,1603) 3928,1555 4320,1555 ; v1(6080,1552) 5349.89,1552 5323.82,1525.93 5171.98,1525.93 5142.91,1555 4320,1555
NetU3_23: U3.23 U4.32 | length 4688.5
  Top Layer w10: U3.23 2510,1476.57 2510,985.86 2515.86,980 6165,980 6255.98,1070.98 U4.32
pads on no net: N1.LHDP N1.RHDP N2.LHDP N2.RHDP N4.LHDP N4.RHDP N5.LHDP N5.RHDP N7.LHDP N7.RHDP N8.LHDP N8.RHDP NCH6100HV.19 NCH6100HV.20 U1.10 U1.11 U1.12 U1.13 U1.14 U1.19 U1.22 U2A.1 U2A.3 U2A.5 U2A.6 U2A.7 U2A.8 U2A.9 U2A.10 U2A.11 U2A.12 U3.22 U4.11 U4.23
copper on no net:
  other v1: 1740,2325